# Altium PCB Open_Rally_Computer.PcbDoc
Units mm, origin at the board's own origin, x right, y up, seen from the top; angles counter-clockwise.
Board outline 103 x 43 mm, 4 copper layers (Top Layer, Inner Layer 1, Inner Layer 2, Bottom Layer), stack 1.57 mm thick; 1 components, 22 nets, 2 pads, 0 vias.
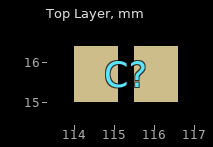
[diagram p0: Top Layer view]
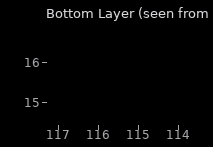
[diagram p1: Bottom Layer view, seen from below]

## Layer stack, top to bottom
Top Solder: solder mask 0.017, Solder Resist, Dk 3.5
Top Layer: signal copper 0.035
Dielectric 1: core 0.35, FR-4, Dk 4.2
Inner Layer 1: signal copper 0.035
Dielectric 2: prepreg 0.73, Dk 4.2
Inner Layer 2: signal copper 0.035
Dielectric 3: core 0.35, Dk 4.2
Bottom Layer: signal copper 0.035
Bottom Solder: solder mask 0.017, Solder Resist, Dk 3.5

## Board outline
10,10 10,53 113,53 113,10

## Design rules (kind name [scope] priority, off if disabled: settings)
BoardOutlineClearance [All] p1: gap=0.2 ignorepadtopadclearanceinfootprint=FALSE except(0: Arc-SplitContinuation Track-SplitContinuation SMDPad-SplitContinuation THPad-SplitContinuation Via-SplitContinuation Fill-SplitContinuation Poly-SplitContinuation Region-SplitContinuation Text-SplitContinuation)
Clearance [All] p1: gap=0.2 ignorepadtopadclearanceinfootprint=FALSE
HoleSize [All] p1: absolutevalues=TRUE maxlimit=3.3 minlimit=0.025 maxpercent=80.000 minpercent=20.000
MinimumSolderMaskSliver [All] p1: minsoldermaskwidth=0.06
PolygonConnect [All] p1: thpad.connectstyle=Relief thpad.reliefconductorwidth=0.254 thpad.reliefentries=4 thpad.polygonreliefangle="90 Angle" thpad.airgapwidth=0.254 smdpad.connectstyle=Relief smdpad.reliefconductorwidth=0.254 smdpad.reliefentries=4 smdpad.polygonreliefangle="90 Angle" smdpad.airgapwidth=0.254 via.connectstyle=Direct via.reliefconductorwidth=0.254 via.reliefentries=4 via.polygonreliefangle="90 Angle" via.airgapwidth=0.254
RoomDefinition Open_Rally_Computer [InComponentClass('Open_Rally_Computer')] p1: confinementstyle=ConfineIn formatcopy=TRUE lockcomponents=FALSE outline 114.2,11.5 117.6,11.5 117.6,16.1 114.2,16.1
RoutingVias [All] p1: holewidth=0.3 width=0.8 viastyle="Through Hole" minholewidth=0.3 minwidth=0.8 maxholewidth=1 maxwidth=3
SilkToSilkClearance [All] p1: silktosilkclearance=0.1
SilkToSolderMaskClearance [IsPad] p1: minsilkscreentomaskgap=0.01 clearancetoexposedcopper=TRUE
SolderMaskExpansion [All] p1: expansion=0.065 istentingtop=FALSE
Width [All] p1: maxlimit=2 minlimit=0.15 preferedwidth=0.15 minimp=50.000000 maximp=50.000000 favimp=50.000000
26 further rules are at their usual default settings.

## Components (designator, comment, footprint, x,y, rotation, side; value= is the part's Value field where it differs from the comment)
C? "CAP_CERAMIC_0805" C0805 115.3,15.7 r0 top value=100nF

## Footprints (in the part's own frame and the unit in brackets; to place one, negate y for a bottom-side part, rotate by r counter-clockwise, add the part's x,y. Pads: shape width x height; smd on the part's side, far side on the other; paste and mask are expansions set on the pad)
C0805 [mm] "Chip Capacitor, Body 2.0x1.3mm, IPC High Density"
  rect 1.1x1.4 smd: 1(-0.75,0) 2(0.75,0)
  body extent -1.1,-0.72 1.1,0.72, height 1.4

## Part data
C?: "Capacitor Ceramic 0805 No Polarized", Case=0805, Voltage=50V, 01_Type=CAPACITOR, Check Footprint=NO, Check Symbol=NO

## Nets (pads, with @x,y where several pads share a name; then routed paths per layer and width w, separated by ;. In a path a pad name is that pad's centre, name@x,y a point inside that pad or via, vN(x,y) a via of type N, cw(c..) or ccw(c..) an arc to the next point about the centre after c; other vN are vias at no path point)
GND: 
NetC?_1: C?.1
NetC?_2: C?.2
NetD?_1: 
NetD?_2: 
NetGPS?_2: 
NetGPS?_3: 
NetGPS?_4: 
NetLCD?_1: 
NetLCD?_2: 
NetLCD?_3: 
NetLCD?_12: 
NetLCD?_13: 
NetLCD?_23: 
NetP?_2: 
NetP?_3: 
NetP?_4: 
NetP?_5: 
NetP?_6: 
NetR?_1: 
NetR?_2: 
NetX?_23: 